# Altium PCB LNA_1.7GHz_first_stage.PcbDoc
Units mm, origin at the board's own origin, x right, y up, seen from the top; angles counter-clockwise.
Board outline 65.9 x 32.8 mm, 2 copper layers (Top Layer, Bottom Layer), stack 0.671 mm thick; 19 components, 11 nets, 87 pads, 174 vias.
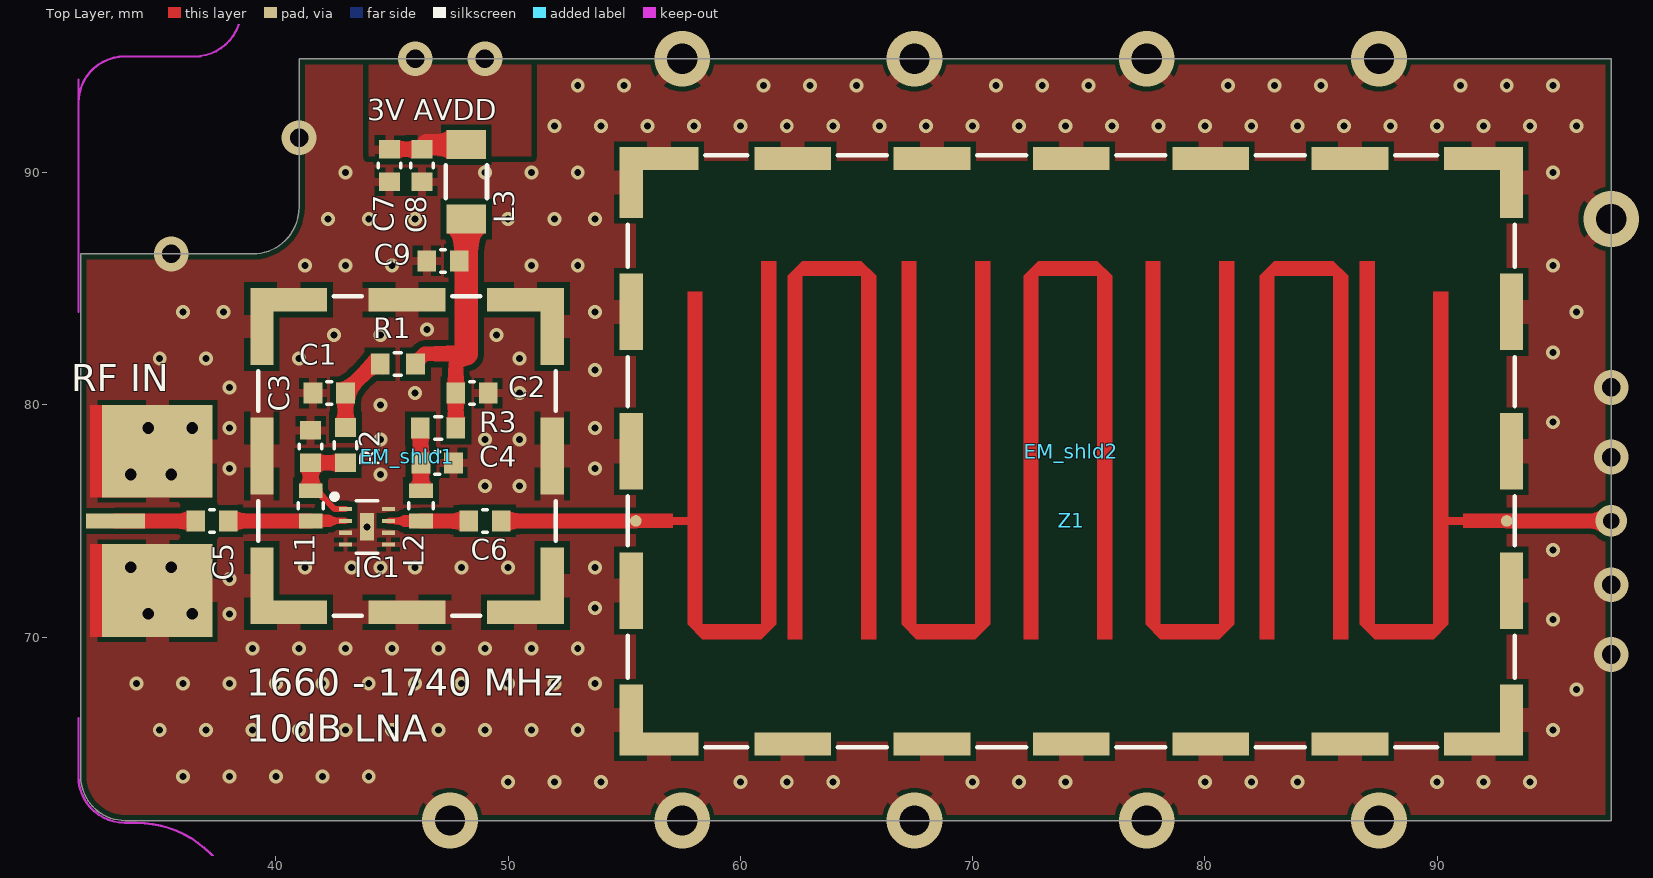
[diagram p0: Top Layer view]
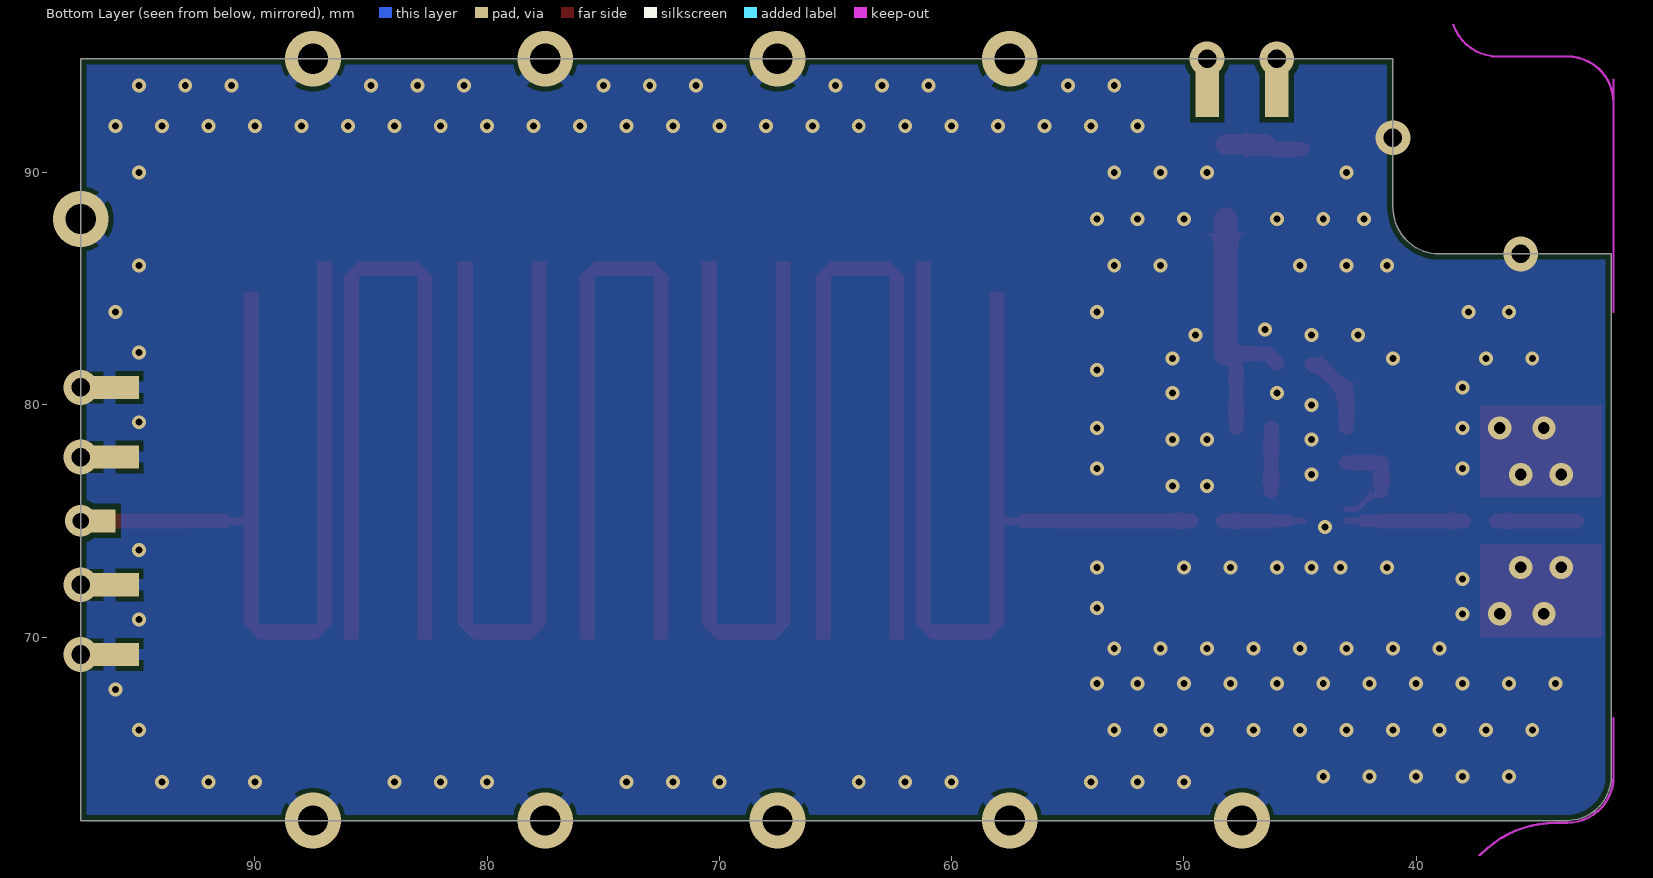
[diagram p1: Bottom Layer view, seen from below]
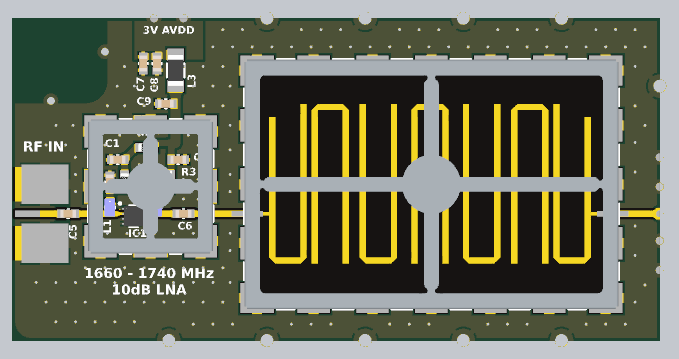
[diagram p2: 3D render of the assembled board from above, using the file's embedded part models]

## Layer stack, top to bottom
Top Solder: solder mask 0.0102, Solder Resist, Dk 3.5
Top Layer: signal copper 0.018
Core: dielectric 0.635, Arlon AD1000, Dk 10.2
Bottom Layer: signal copper 0.018
Bottom Solder: solder mask 0.0102, Solder Resist, Dk 3.5

## Board outline
33.5,62.1 cw(c33.5,64) 31.6,64 31.6,86.5 39,86.5 ccw(c39,88.5) 41,88.5 41,94.9 97.5,94.9 97.5,62.1

## Design rules (kind name [scope] priority, off if disabled: settings)
BoardOutlineClearance [All] p1: gap=0.254 ignorepadtopadclearanceinfootprint=FALSE except(0: Arc-SplitContinuation Track-SplitContinuation SMDPad-SplitContinuation THPad-SplitContinuation Via-SplitContinuation Fill-SplitContinuation Poly-SplitContinuation Region-SplitContinuation Text-SplitContinuation)
Clearance [All] p1: gap=0.15 ignorepadtopadclearanceinfootprint=FALSE except(0.254: Arc-Poly Track-Poly SMDPad-Poly THPad-Poly Via-Poly Fill-Poly Poly-Poly Poly-Region Poly-Text Poly-Hole)
PolygonConnect [All] p1: thpad.connectstyle=Relief thpad.reliefconductorwidth=0.254 thpad.reliefentries=4 thpad.polygonreliefangle="90 Angle" thpad.airgapwidth=0.254 smdpad.connectstyle=Relief smdpad.reliefconductorwidth=0.365 smdpad.reliefentries=4 smdpad.polygonreliefangle="90 Angle" smdpad.airgapwidth=0.2 via.connectstyle=Direct via.reliefconductorwidth=0.254 via.reliefentries=4 via.polygonreliefangle="90 Angle" via.airgapwidth=0.254
RoutingVias [All] p1: holewidth=0.711 width=1.27 viastyle="Through Hole" minholewidth=0.711 minwidth=1.27 maxholewidth=0.711 maxwidth=1.27
SolderMaskExpansion [All] p1: expansion=0.102 istentingtop=FALSE
Width [All] p1: maxlimit=2.54 minlimit=0.1 preferedwidth=0.635 impedanceprofiledriven=TRUE impedanceprofileid={E40D00CD-2FD9-45DB-8FD6-8CAF1FACEA0F} impedanceprofilevalue=50.000000 minimp=50.000000 maximp=50.000000 favimp=50.000000
30 further rules are at their usual default settings.

## Components (designator, comment, footprint, x,y, rotation, side; value= is the part's Value field where it differs from the comment)
C1 "DNI" C0603#1 42.3,80.5 r0 top
C2 "4.7uF" C0603#1 48.45,80.5 r0 top
C3 "4.7uF" C0603#1 41.5,78.2 r270 top
C4 "33pF" C0603#1 46.95,77.5 r0 top
C5 "5.9pF" C0603#2 37.25,75 r0 top locked
C6 "100pF" C0603#2 49,75 r0 top
C7 "4.7uF" C0603#1 44.9,90.3 r90 top
C8 "0.1uF" C0603#1 46.3,90.3 r90 top
C9 "0.1uF" C0603#1 47.2,86.2 r0 top
EM_shld1 "3610213126S" 3610213126S 45.65,77.794 r0 top locked
EM_shld2 "3610637256S" 3610637256S 74.25,78 r180 top locked
IC1 "PMA2-33LN+" MC1631-1_MNC-L 43.925,74.746 r0 top locked
L1 "100nH" L0603_HP 41.5,75.65 r270 top
L2 "33nH" L0603_HP 46.25,75.65 r270 top
L3 "1uH" L1206_Murata 48.2,89.6 r90 top
R1 "4.02kΩ" R0603 45.25,81.75 r180 top
R2 "0Ω" R0603 43,78.262 r90 top
R3 "10Ω" R0603 46.988,79 r0 top
Z1 "1660 to 1740 MHz" BPF_1700MHz_10.2_635um 55.5,75 r0 top locked

## Footprints (in the part's own frame and the unit in brackets; to place one, negate y for a bottom-side part, rotate by r counter-clockwise, add the part's x,y. Pads: shape width x height; smd on the part's side, far side on the other; paste and mask are expansions set on the pad)
3610213126S [mm] "Shielding Cabinet, SMD Frame, body 12.7x13.66mm"
  rect 1x3.3 smd: 1(-6.25,-5.58) 1(-6.25,0) 1(-6.25,5.58) 1(6.25,-5.58) 1(6.25,0) 1(6.25,5.58)
  rect 3.3x1 smd: 1(-5.1,-6.73) 1(-5.1,6.73) 1(0,-6.73) 1(0,6.73) 1(5.1,-6.73) 1(5.1,6.73)
  silkscreen extent -6.4,-6.88 6.4,6.88, body extent -6.35,-6.83 6.35,6.83, height 2.55
3610637256S [mm] "Shielding Cabinet, SMD Frame, 38.1x25.4mm"
  rect 1x3.05 smd: 1(-18.95,-11.575) 1(-18.95,11.575) 1(18.95,-11.575) 1(18.95,11.575)
  rect 1x3.3 smd: 1(-18.95,-6) 1(-18.95,0) 1(-18.95,6) 1(18.95,-6) 1(18.95,0) 1(18.95,6)
  rect 3.4x1 smd: 1(-17.75,12.6) 1(-17.75,-12.6) 1(17.75,12.6) 1(17.75,-12.6)
  rect 3.3x1 smd: 1(-12,12.6) 1(-12,-12.6) 1(-6,12.6) 1(-6,-12.6) 1(0,12.6) 1(0,-12.6) 1(6,12.6) 1(6,-12.6) 1(12,12.6) 1(12,-12.6)
  silkscreen extent -19.1,-12.75 19.1,12.75, body extent -19.05,-12.7 19.05,12.7, height 6
BPF_1700MHz_10.2_635um [mm] "stripline LPF"
  round 0.5 smd: 1(0,0) 2(37.5,0)
  Top Layer region: 0,-0.16 2.227,-0.16 2.227,-4.45 2.227,-4.45 2.227,-4.45 2.227,-4.45 2.862,-5.085 2.862,-5.085 2.862,-5.085 2.863,-5.085 5.403,-5.085 5.403,-5.085 5.403,-5.085 5.403,-5.085 6.038,-4.45 6.038,-4.45 6.038,-4.45 6.038,-4.45 6.038,11.185 6.038,11.185 6.038,11.185 6.038,11.185 6.038,11.185 6.038,11.185 5.403,11.185 5.402,11.185 5.402,11.185 5.402,11.185 5.402,11.185 5.402,11.185 5.402,-4.45 2.863,-4.45 2.863,9.868 2.863,9.868 2.863,9.868 2.863,9.868 2.863,9.868 2.863,9.868 2.228,9.868 2.227,9.868 2.227,9.868 2.227,9.868 2.227,9.867 2.227,9.868 2.227,0.16 0,0.16
  Top Layer region: 6.54,-5.085 6.54,-5.085 6.54,-5.085 6.54,-5.085 6.541,-5.085 6.541,-5.085 7.176,-5.085 7.176,-5.085 7.176,-5.085 7.176,-5.085 7.176,-5.085 7.176,-5.085 7.176,10.55 9.715,10.55 9.715,-5.085 9.715,-5.085 9.715,-5.085 9.715,-5.085 9.716,-5.085 9.716,-5.085 10.351,-5.085 10.351,-5.085 10.351,-5.085 10.351,-5.085 10.351,-5.085 10.351,-5.085 10.351,10.55 10.351,10.55 10.351,10.55 10.351,10.55 9.716,11.185 9.716,11.185 9.716,11.185 9.716,11.185 7.176,11.185 7.175,11.185 7.175,11.185 7.175,11.185 6.54,10.55 6.54,10.55 6.54,10.55 6.54,10.55
  Top Layer region: 16.699,-5.085 16.699,-5.085 16.699,-5.085 16.699,-5.085 16.7,-5.085 16.7,-5.085 17.335,-5.085 17.335,-5.085 17.335,-5.085 17.335,-5.085 17.335,-5.085 17.335,-5.085 17.335,10.55 19.874,10.55 19.874,-5.085 19.874,-5.085 19.874,-5.085 19.874,-5.085 19.875,-5.085 19.875,-5.085 20.51,-5.085 20.51,-5.085 20.51,-5.085 20.51,-5.085 20.51,-5.085 20.51,-5.085 20.51,10.55 20.51,10.55 20.51,10.55 20.51,10.55 19.875,11.185 19.875,11.185 19.875,11.185 19.875,11.185 17.335,11.185 17.334,11.185 17.334,11.185 17.334,11.185 16.699,10.55 16.699,10.55 16.699,10.55 16.699,10.55
  Top Layer region: 26.858,-5.085 26.858,-5.085 26.858,-5.085 26.858,-5.085 26.859,-5.085 26.859,-5.085 27.494,-5.085 27.494,-5.085 27.494,-5.085 27.494,-5.085 27.494,-5.085 27.494,-5.085 27.494,10.55 30.033,10.55 30.033,-5.085 30.033,-5.085 30.033,-5.085 30.033,-5.085 30.034,-5.085 30.034,-5.085 30.669,-5.085 30.669,-5.085 30.669,-5.085 30.669,-5.085 30.669,-5.085 30.669,-5.085 30.669,10.55 30.669,10.55 30.669,10.55 30.669,10.55 30.034,11.185 30.034,11.185 30.034,11.185 30.034,11.185 27.494,11.185 27.493,11.185 27.493,11.185 27.493,11.185 26.858,10.55 26.858,10.55 26.858,10.55 26.858,10.55
  Top Layer region: 34.346,-5.085 34.346,-5.085 34.346,-5.085 34.347,-5.085 34.347,-5.085 34.347,-5.085 34.347,-5.085 34.982,-4.45 34.982,-4.45 34.982,-4.45 34.982,-4.45 34.982,-0.16 37.5,-0.16 37.5,0.16 34.982,0.16 34.982,9.868 34.982,9.868 34.982,9.868 34.982,9.868 34.982,9.868 34.982,9.868 34.347,9.868 34.347,9.868 34.346,9.868 34.346,9.868 34.346,9.868 34.346,9.868
  Top Layer pour cut-out: 0,15.5 37.5,15.5 37.5,-9.5 0,-9.5
  Top Layer region: -1.587,-0.299 -1.587,0.299 1.587,0.299 1.587,-0.299
  Top Layer region: 11.45,-4.45 11.45,11.185 12.085,11.185 12.085,-5.085
  Top Layer region: 11.45,-4.45 12.085,-5.085 14.625,-5.085 15.26,-4.45
  Top Layer region: 14.625,-5.085 14.625,11.185 15.26,11.185 15.26,-4.45
  Top Layer region: 21.95,-4.45 21.95,11.185 22.585,11.185 22.585,-5.085
  Top Layer region: 21.95,-4.45 22.585,-5.085 25.125,-5.085 25.76,-4.45
  Top Layer region: 25.125,-5.085 25.125,11.185 25.76,11.185 25.76,-4.45
  Top Layer region: 31.172,-4.45 31.807,-5.085 31.807,11.185 31.172,11.185
  Top Layer region: 31.172,-4.45 31.807,-5.085 34.347,-5.085 34.982,-4.45
  Top Layer region: 35.622,-0.299 35.622,0.299 38.797,0.299 38.797,-0.299
C0603#1 [mm] "Chip Capacitor, Body 1.6x0.8mm, IPC High Density"
  rect 0.8x0.9 smd: 1(-0.7,0) 2(0.7,0)
  silkscreen extent -0.1,-0.48 0.1,0.48, body extent -0.8,-0.4 0.8,0.4, height 0.79
C0603#2 [mm] "Chip Capacitor, Body 1.6x0.8mm, IPC High Density"
  rect 0.8x0.9 smd mask+0.254: 1(-0.7,0) 2(0.7,0)
  silkscreen extent -0.1,-0.48 0.1,0.48, body extent -0.8,-0.4 0.8,0.4, height 0.79
L0603_HP [mm]
  rect 0.64x1.02 smd: 1(-0.65,0)
  rect 0.64x1.02 smd mask+0.254: 2(0.65,0)
  silkscreen extent -0.13,-0.53 0.13,0.53, body extent -0.88,-0.54 0.87,0.55, height 0.93
L1206_Murata [mm]
  rect 1.25x1.7 smd: 1(-1.6,0) 2(1.6,0)
  silkscreen extent -0.71,-0.89 0.71,0.89, body extent -1.6,-0.8 1.6,0.8, height 1.5
MC1631-1_MNC-L [mil]
  rect 21.87x7.03 smd paste+0 mask+0: BIAS(-36.44,30) GND(-36.44,-30) GND(-36.44,-10) GND(36.44,-30) GND(36.44,-10) GND(36.44,30) RF-IN(-36.44,10) RF-OUT(36.44,10)
  rect 24x47 smd paste+0 mask+4: GND(0,0)
  silkscreen extent -59,-44 18,55, body extent -39,-39 39,39, height 41
R0603 [mm]
  rect 0.8x0.9 smd: 1(-0.762,0) 2(0.762,0)
  silkscreen extent -0.15,-0.48 0.15,0.48, body extent -0.85,-0.4 0.85,0.4, height 0.56

## Part data
C1 C2 C3 C4 C5 C6 C7 C8 C9: library part CAP, "Керамический конденсатор", Вид монтажа=SMD, Диэлектрик=X5R, Корпус="0603 [1608 Метрический]", Напряжение=16B, Температурный диапазон="-55 ~ 100", Тип элемента="Керамический конденсатор"
  C1: Номинал=DNI
  C2 C3 C7: Номинал=4.7uF
  C4: Номинал=33pF
  C5: Номинал=5.9pF
  C6: Номинал=100pF
  C8 C9: Номинал=0.1uF
EM_shld1: library part "RF Shield", "RF Shield Frame X 0.522\" (13.26mm) Surface Mount", Артикул=3610213126S, Вид монтажа=SMD/SMT, Корпус="0.522\" (13.26mm)", Примечание="Mate with 3600213120S (Two pieces shield)", Производитель="Wurth Elektronik", Тип элемента="EMI/RFI Shield, One-Piece"
EM_shld2: library part "RF Shield", "RF Shield Frame X 1.484\" (37.70mm) Surface Mount", Артикул=3610637256S, Вид монтажа=SMD/SMT, Корпус="1.484\" (37.70mm)", Примечание="Mate with 3600637250S (Two pieces shield)", Производитель="Wurth Elektronik", Тип элемента="EMI/RFI Shield, One-Piece"
IC1: "Малошумяший усилитель", Артикул=PMA2-33LN+, Вид монтажа=SMD, Название=PMA2-33LN+, Производитель=Mini-Circuits, Температурный диапазон="-40 ~ 100", Тип элемента=Микросхема
L1 L2: library part "Inducror RF", "Индуктивность", Вид монтажа=SMD, Корпус="0603 [1608 Метрический]", Производитель=Coilcraft, Температурный диапазон="-40ºC to 125ºC", Тип элемента="Катушка индуктивности"
  L1: Номинал=100nH
  L2: Номинал=33nH
L3: library part "Inducror LF", "Индуктивность", Вид монтажа=SMD, Корпус="1206 [3216 Metric]", Номинал=1uH, Производитель=Murata, Температурный диапазон="-40ºC to 125ºC", Тип элемента="Катушка индуктивности"
R1 R2 R3: library part RES, "SMD резистор", Вид монтажа=SMD, Корпус="0603 [1608 Метрический]", Название=Резистор, Производитель=1%, Тип элемента=Резистор, Точность=1%
  R1: Номинал=4.02kΩ
  R2: Номинал=0Ω
  R3: Номинал=10Ω
Z1: library part BPF_1700MHz, "Полосковый фильтр", Артикул=BPF_1700MHz, Вид монтажа=SMD, Название=BPF_1700MHz, Номинал="1660 to 1740 MHz", Примечание="потери 4.5 дБ", Температурный диапазон="-40 ~ 100", Тип элемента="Полосковый фильтр"

## Free pads (board coordinates)
  rect 4.75x4 smd mask-0.254: GND(34.9,72) GND(34.9,78)
  rect 1x2.5 smd far side: GND(46,93.65) GND(49,93.65)
  rect 2.5x1 smd far side: GND(96.25,69.25) GND(96.25,72.25) GND(96.25,77.75) GND(96.25,80.75)
  rect 2.54x0.635 smd mask+0.255: "RF IN"(33.1,75)
  rect 1.5x1 smd far side mask+0.254: "RF OUT"(96.75,75)

## Via types
v1: diameter 0.6, hole 0.3, Top Layer to Bottom Layer, tented both sides, 146 vias
v2: diameter 2.4, hole 1.3, Top Layer to Bottom Layer, 10 vias
v3: diameter 1.5, hole 0.8, Top Layer to Bottom Layer, 8 vias
v4: diameter 1, hole 0.5, Top Layer to Bottom Layer, tented both sides, 8 vias
v5: diameter 1.35, hole 0.7, Top Layer to Bottom Layer, 1 vias
v6: diameter 0.6, hole 0.3, Top Layer to Bottom Layer, 1 vias

## Nets (pads, with @x,y where several pads share a name; then routed paths per layer and width w, separated by ;. In a path a pad name is that pad's centre, name@x,y a point inside that pad or via, vN(x,y) a via of type N, cw(c..) or ccw(c..) an arc to the next point about the centre after c; other vN are vias at no path point)
3V_AVDD: C7.2 C8.2 L3.2 pad.GND@46,93.65 pad.GND@49,93.65 | length 3.1
  Top Layer w0.635: C7.2 C8.2
  Top Layer w0.9: C8.2@46.5,91.2 L3.2
  other v3: 46,94.9 49,94.9
_3V_AVDD_flt: C2.1 C9.2 L3.1 R1.1 R3.2 | length 11.5
  Top Layer w0.635: R1.1@46.012,81.8 46.412,82.2 48.2,82.2 47.75,81.75 C2.1 R3.2
  Top Layer w1: 48.2,82.2 L3.1
AGND: C1.1 C2.2 C3.1 C4.2 C7.1 C8.1 C9.1 EM_shld1.1 EM_shld2.1 IC1.GND pad.GND@34.9,72 pad.GND@34.9,78 pad.GND@96.25,69.25 pad.GND@96.25,72.25 pad.GND@96.25,77.75 pad.GND@96.25,80.75
  other v1: 50,63.75 52,63.75 54,63.75 60,63.75 62,63.75 64,63.75 70,63.75 72,63.75 74,63.75 80,63.75 82,63.75 84,63.75 90,63.75 92,63.75 94,63.75 36,64 38,64 40,64 42,64 44,64 35,66 37,66 39,66 41,66 43,66 45,66 47,66 49,66 51,66 53,66 95,66 96,67.75 34,68 36,68 38,68 40,68 42,68 44,68 46,68 48,68 50,68 52,68 53.75,68 39,69.5 41,69.5 43,69.5 45,69.5 47,69.5 49,69.5 51,69.5 53,69.5 95,70.75 38,71 53.75,71.25 38,72.5 41.25,73 43.25,73 44.5,73 46,73 48,73 50,73 53.75,73 95,73.75 49,76.5 50.5,76.5 44.5,77 38,77.25 53.75,77.25 44.5,78.5 49,78.5 50.5,78.5 38,79 53.75,79 95,79.25 44.5,80 46,80.5 50.5,80.5 38,80.75 53.75,81.5 35,82 37,82 41,82 50.5,82 95,82.25 42.5,83 44.5,83 49.5,83 46.5,83.25 36,84 37.75,84 53.75,84 96,84 41.25,86 43,86 45,86 51,86 53,86 95,86 42.25,88 44,88 46,88 50,88 52,88 53.75,88 43,90 49,90 51,90 53,90 95,90 52,92 54,92 56,92 58,92 60,92 62,92 64,92 66,92 68,92 70,92 72,92 74,92 76,92 78,92 80,92 82,92 84,92 86,92 88,92 90,92 92,92 94,92 96,92 53,93.75 55,93.75 61,93.75 63,93.75 65,93.75 71,93.75 73,93.75 75,93.75 81,93.75 83,93.75 85,93.75 91,93.75 93,93.75 95,93.75
  other v2: 47.5,62.1 57.5,62.1 67.5,62.1 77.5,62.1 87.5,62.1 97.5,88 57.5,94.9 67.5,94.9 77.5,94.9 87.5,94.9
  other v3: 97.5,69.25 97.5,72.25 97.5,77.75 97.5,80.75 35.5,86.5 41,91.5
  other v4: 34.5,71 36.4,71 33.75,73 35.5,73 33.75,77 35.5,77 34.5,79 36.4,79
  other v6: 43.925,74.746
NetC1_2: C1.2 R1.2 R2.2 | length 3.5
  Top Layer w0.635: C1.2@42.994,80.506 C1.2 ; R2.2 C1.2 ; R1.2 44.2,81.75 43,80.55 C1.2
NetC3_2: C3.2 IC1.BIAS L1.1 R2.1 | length 4.5
  Top Layer w0.254: L1.1 41.693,76.107 41.943,76.107 42.542,75.508 IC1.BIAS
  Top Layer w0.635: L1.1 C3.2 R2.1
NetC4_1: C4.1 L2.1 R3.1 | length 2.7
  Top Layer w0.635: R3.1 46.238,78.988 46.238,77.512 C4.1 L2.1
NetC5_1: "pad.RF IN" C5.1 | length 3.5
  Top Layer w0.635: 33.1,75 C5.1
NetC5_2: C5.2 IC1.RF-IN L1.2 | length 5
  Top Layer w0.254: 42.3,75 IC1.RF-IN
  Top Layer w0.512: L1.2 42.3,75
  Top Layer w0.635: C5.2 L1.2
NetC6_1: C6.1 IC1.RF-OUT L2.2 | length 3.4
  Top Layer w0.254: IC1.RF-OUT 45.551,75
  Top Layer w0.512: 45.551,75 L2.2
  Top Layer w0.635: L2.2 C6.1
NetC6_2: C6.2 Z1.1 | length 5.8
  Top Layer w0.635: C6.2 Z1.1
NetZ1_2: "pad.RF OUT" Z1.2 | length 4.5
  Top Layer w0.635: Z1.2 v5(97.5,75)

## Polygon pours and split planes (outlines as drawn)
AGND on Top Layer "NONET_L01_P-001" (solid, remove dead copper, pour order 2): 31.6,94.9 97.5,94.9 97.5,62.1 31.6,62.1
3V_AVDD on Top Layer "NONET_L01_P-001" (solid, remove dead copper, pour order 0): 44,94.9 51,94.9 51,90.7 44,90.7
AGND on Bottom Layer "NONET_L01_P-001" (solid, remove dead copper, pour order 1): 97.5,62.1 97.5,94.9 31.6,94.9 31.6,62.1

## Keep-outs
Keep-Out Layer:
  lines w0.1: 31.5,66.5 31.5,64 ccw(c33.5,64) 33.5,62 34,62 cw(c34,57.5) 38.5,57.5 38.5,49 ccw(c40.5,49) 40.5,47 164.5,47 ccw(c164.5,49) 166.5,49 166.5,53 cw(c168.5,53) 168.5,55 171.5,55 ccw(c171.5,57) 173.5,57 173.5,86 ccw(c171.5,86) 171.5,88 171,88 cw(c171,92.5) 166.5,92.5 166.5,101 ccw(c164.5,101) 164.5,103 40.5,103 ccw(c40.5,101) 38.5,101 38.5,97 cw(c36.5,97) 36.5,95 33.5,95 ccw(c33.5,93) 31.5,93 ; 31.5,84 31.5,94

## Other copper
Top Layer:
  rectangle net AGND: 32,76 37.25,80
  rectangle net AGND: 32,70 37.25,74

## Silkscreen, mask and mechanical layers (free items; w line width, h text height)
Top Overlay:
  text "3V AVDD" at 43.932,91.947 h1.52
  text "RF IN" at 31.182,80.197 h2
  text "1660 - 1740 MHz / 10dB LNA" at 38.733,65.094 h2
Top Solder:
  rectangle: 31.6,70.25 37.025,73.75
  rectangle: 31.6,76.25 37.025,79.75
Mechanical 1:
  pour cut-out: 39.75,84.25 51.5,84.25 51.5,71.4 39.75,71.4
Dimensions:
  circle w0.1: c169.5,59 r2
  circle w0.05: c169.5,59 r0.025
  circle w0.1: c35.5,91 r2
  circle w0.05: c35.5,91 r0.025
  lines w0.1: 26,75 176,75 ; 102.5,43 102.5,107 ; 31.6,93 cw(c33.5,93) 33.5,94.9 ; 31.6,93 cw(c33.5,93) 33.5,94.9 ; 31.6,93 31.6,88 36.5,88 ccw(c36.5,90.1) 38.6,90.1 38.6,97 ; 31.6,93 31.6,64 ccw(c33.5,64) 33.5,62.1 34,62.1 cw(c34,57.5) 38.6,57.5 38.6,49 ccw(c40.5,49) 40.5,47.1 164.5,47.1 ccw(c164.5,49) 166.4,49 166.4,53 ; 33.5,94.9 36.5,94.9 ; 33.5,94.9 36.5,94.9 ; 36.5,94.9 ccw(c36.5,97) 38.6,97 ; 36.5,94.9 ccw(c36.5,97) 38.6,97 ; 38.6,97 38.6,101 cw(c40.5,101) 40.5,102.9 164.5,102.9 cw(c164.5,101) 166.4,101 166.4,92.5 ccw(c171,92.5) 171,87.9 171.5,87.9 cw(c171.5,86) 173.4,86 173.4,57 ; 166.4,53 cw(c168.5,53) 168.5,55.1 ; 166.4,53 cw(c168.5,53) 168.5,55.1 ; 166.4,53 166.4,59.9 cw(c168.5,59.9) 168.5,62 173.4,62 173.4,57 ; 168.5,55.1 171.5,55.1 ; 168.5,55.1 171.5,55.1 ; 171.5,55.1 ccw(c171.5,57) 173.4,57 ; 171.5,55.1 ccw(c171.5,57) 173.4,57
Board Shape:
  the board outline again, w0.1

## Dimensions
33.5,62.1 to 26,75 on Dimensions
40.5,47.1 to 40.5,102.9 on Dimensions
31.6,64 to 173.4,57 on Dimensions